# EAGLE board TDFC_V2.0_Black_10by10_1.6mm_ENIG_10pcs (EAGLE 6.5.0), part 1 of 2
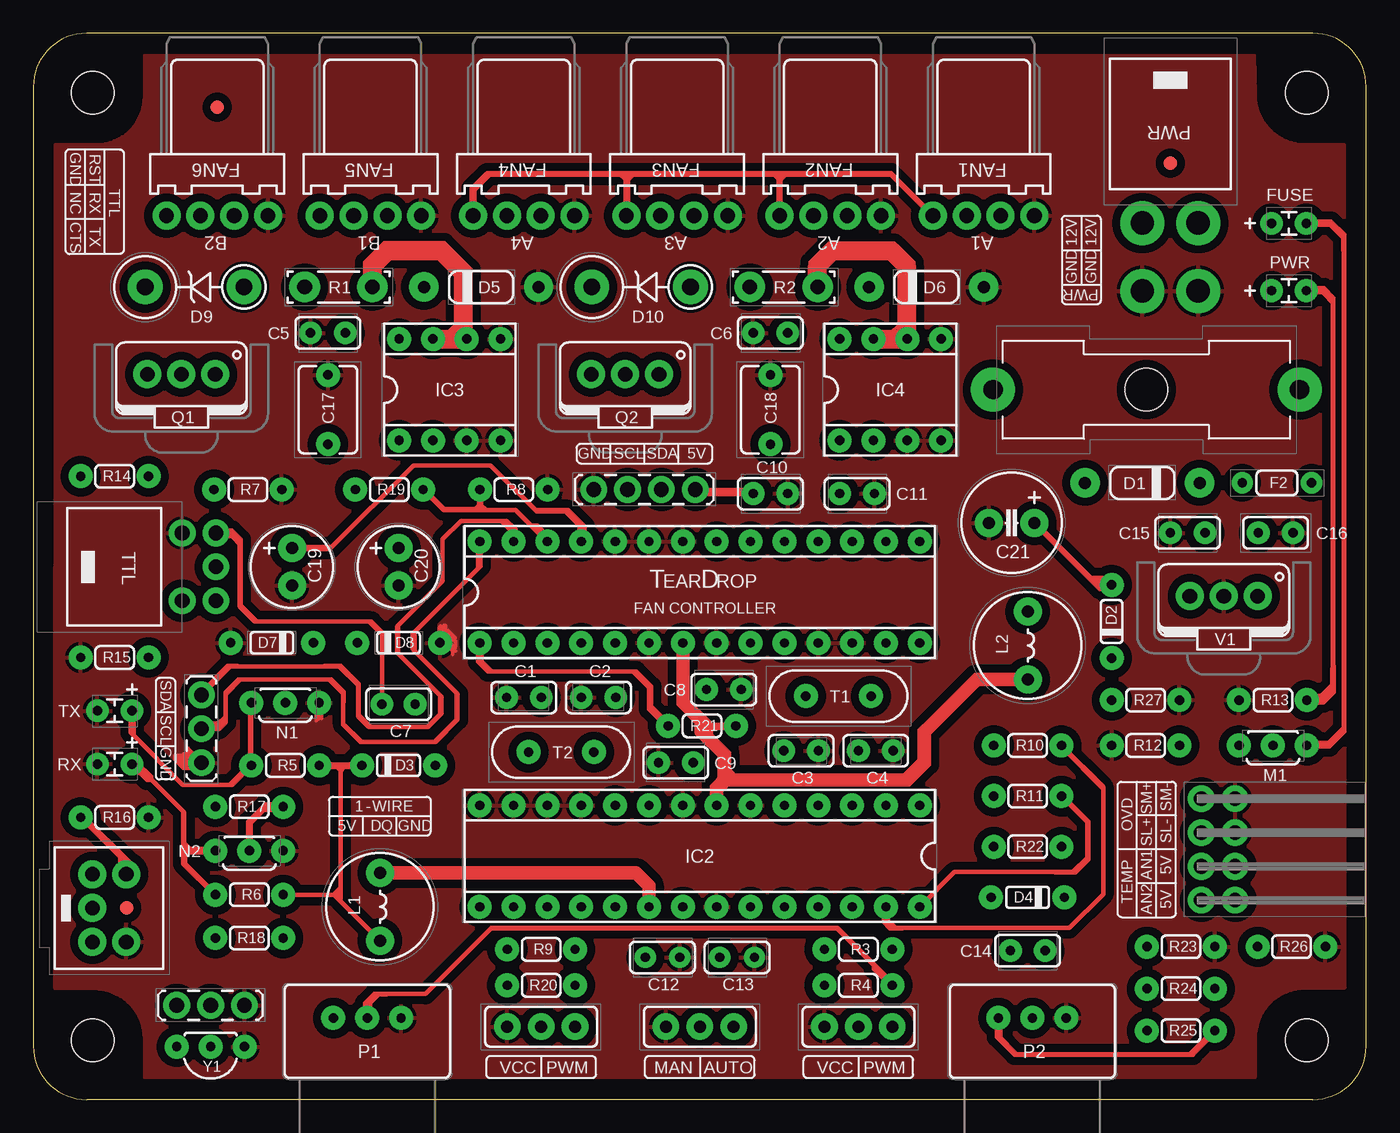
[diagram p0: board, top side]
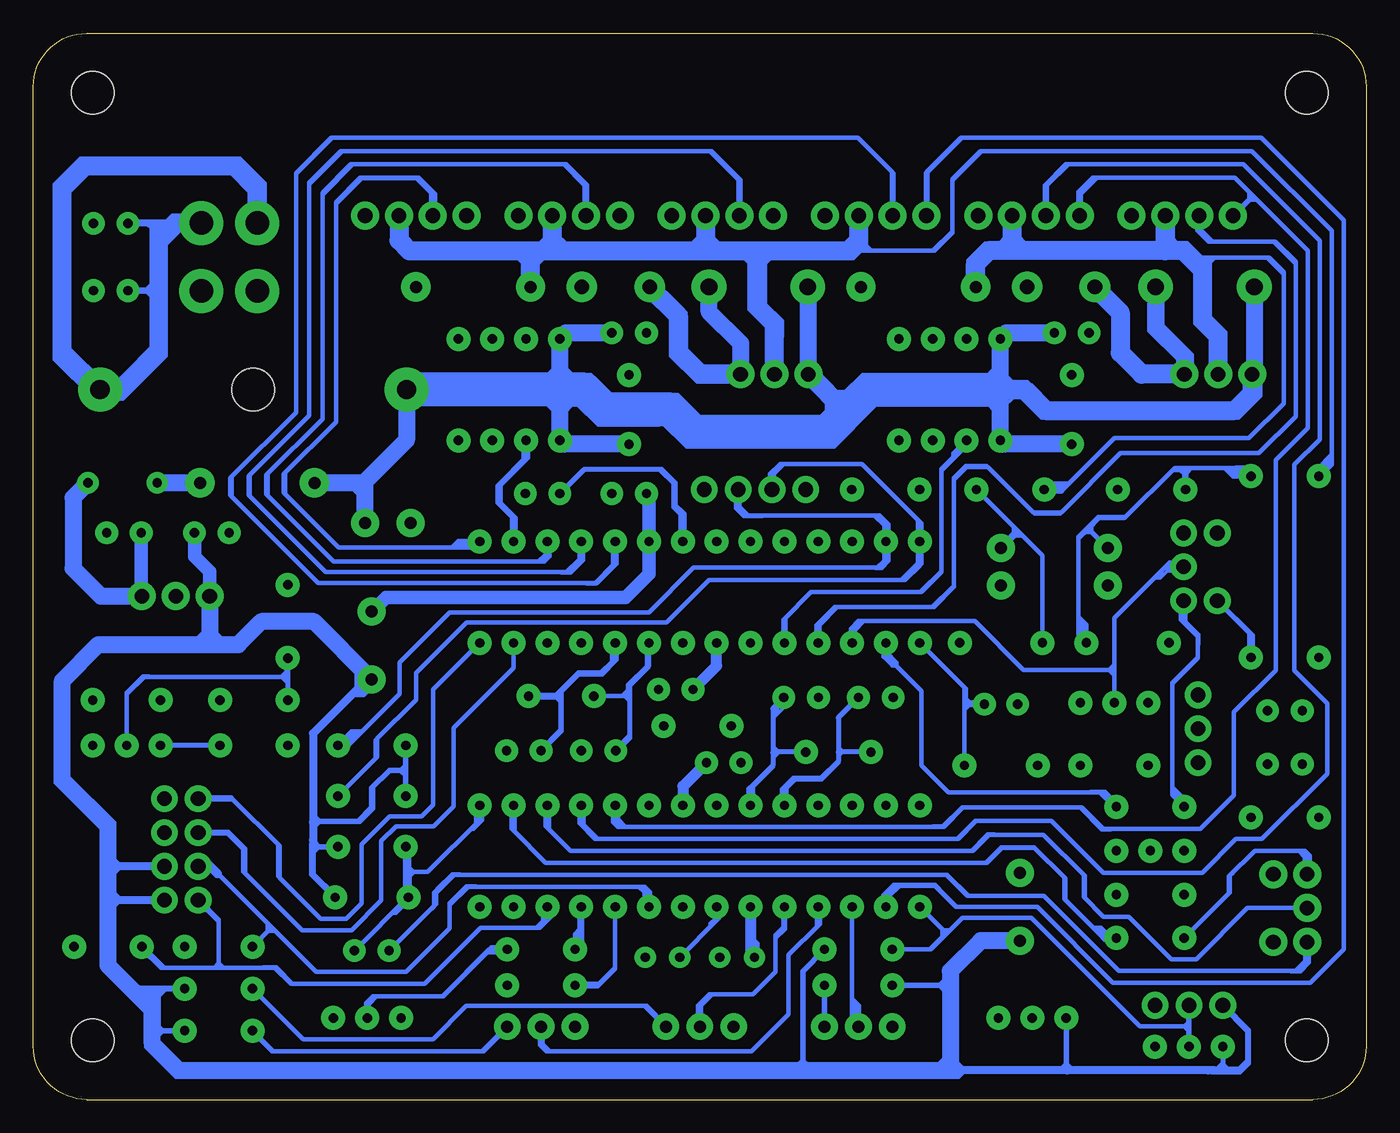
[diagram p1: board, bottom side, seen from below]

Size 100 x 80.01 mm. Coordinates in mm from the lower left corner, seen from the top.
Copper layers (1*16): Top 0.035mm / dielectric 1.5mm / Bottom 0.035mm
Design rules "ITEADstudio_DRC *": minimum track width 6mil, minimum drill 12mil, track to track 12mil, track to pad 12mil, pad to pad 12mil, via to via 12mil, smd to smd 0mil, copper to edge 12mil, drill to drill 12mil, minimum pad ring 10mil, minimum via ring 6mil, stop-mask expansion 2mil, vias tented up to drill 100mil, thermal gap 10mil
Net classes: 0 default: clearance 0.355 mm

## Footprints (pad centres in the part's own frame; a part is rotated, then mirrored left to right if it is on the bottom)
MLCC_CERAMIC_9 = drill 0.7 pad 1.7: 1 -1.3,0; 2 1.3,0
MLCC_CERAMIC_11 = drill 0.7 pad 1.7: 1 -1.3,0; 2 1.3,0
MLCC_CERAMIC_5 = drill 0.7 pad 1.7: 1 -1.3,0; 2 1.3,0
MLCC_CERAMIC_7 = drill 0.7 pad 1.7: 1 1.24,0; 2 -1.24,0
MLCC_CERAMIC = drill 0.7 pad 1.7: 1 -1.3,0; 2 1.3,0
MLCC_CERAMIC_17 = drill 0.7 pad 1.7: 1 -1.3,0; 2 1.3,0
MLCC_CERAMIC_6 = drill 0.7 pad 1.6: 1 -1.3,0; 2 1.3,0
MLCC_CERAMIC_14 = drill 0.7 pad 1.7: 1 -1.3,0; 2 1.3,0
MLCC_CERAMIC_16 = drill 0.7 pad 1.7: 1 -1.3,0; 2 1.3,0
MLCC_CERAMIC_15 = drill 0.7 pad 1.7: 1 -1.3,0; 2 1.3,0
WIMA_CAPACITOR_2 = drill 0.7 pad 1.8: 1 -2.6,0; 2 2.6,0
CAPACITOR_6.3_RIGHT = drill 0.9 pad 2.1: + 1.4,0; - -1.4,0
ELECTROLYTIC_CAPACITOR_RIGHT = drill 0.9 pad 2.1: + 1.7,0; - -1.7,0
UF4004 = drill 0.9 pad 2.2: A 4.3,0; C -4.3,0
1N4148 = drill 0.7 pad 1.8: A -2.75,0; C 2.75,0
1N4148_2 = drill 0.7 pad 1.8: A -2.75,0; C 2.75,0
UF4004_2 = drill 0.9 pad 2.2: A 4.3,0; C -4.3,0
DO34_2 = drill 0.7 pad 1.8: A -3.1,0; C 3.1,0
DO34Z7 = drill 0.7 pad 1.8: A 3.1,0; C -3.1,0
TVS_DIODE_5 = drill 1.25 pad 2.6: A 3.7,0; C -3.7,0
FUSE_GLASS = drill 1.45 pad 3.3: 1 11.5,0; 2 -11.5,0 | hole 3.2: 0,0
PTC = drill 0.7 pad 1.6: 1 -2.6,0; 2 2.6,0
4PIN_FAN_HEADER = drill 1.1 pad 2.1: 1 3.81,-2.34; 2 1.27,-2.34; 3 -1.27,-2.34; 4 -3.81,-2.34
FIDUCIAL-1X2 = smd 1 x 1: 1 0,0
LED_1.8_LEFT = drill 0.7 pad 1.7: A -1.3,0; K 1.3,0
IO_GENERAL_7 = drill 1.1 pad 2: SYSTEM_LED+ 1.27,1.27; SYSTEM_LED- 3.81,1.27; SYSTEM_MODE+ 1.27,3.81; SYSTEM_MODE- 3.81,3.81; TEMP_AN1_A 1.27,-1.27; TEMP_AN1_B 3.81,-1.27; TEMP_AN2_A 1.27,-3.81; TEMP_AN2_B 3.81,-3.81
TTL_USB_5 = drill 1.1 pad 2: CTS -2.54,-1.27; GND 2.54,-1.27; RST 2.54,-3.81; RX 0,-3.81; TX -2.54,-3.81
TT_USB_4 = drill 1.1 pad 2.1: CTS -2.54,1.27; GND 2.54,1.27; RST 2.54,-1.27; RX 0,-1.27; TX -2.54,-1.27
4_PIN_HEADER_VERTICAL_2 = drill 1.1 pad 2: GND -3.81,0; SCL -1.27,0; SDA 1.27,0; VCC 3.81,0
3_PIN_VERTICAL_4 = drill 1.1 pad 2: GND 0,-2.54; SCL 0,0; SDA 0,2.54
3_PIN_VERTICAL = drill 1.1 pad 2: DQ 0,0; GND 2.54,0; VCC -2.54,0
ATMEGA328P = drill 0.7 pad 1.8: 1 -16.51,-3.81; 2 -13.97,-3.81; 3 -11.43,-3.81; 4 -8.89,-3.81; 5 -6.35,-3.81; 6 -3.81,-3.81; 7 -1.27,-3.81; 8 1.27,-3.81; 9 3.81,-3.81; 10 6.35,-3.81; 11 8.89,-3.81; 12 11.43,-3.81; 13 13.97,-3.81; 14 16.51,-3.81; 15 16.51,3.81; 16 13.97,3.81; 17 11.43,3.81; 18 8.89,3.81; 19 6.35,3.81; 20 3.81,3.81; 21 1.27,3.81; 22 -1.27,3.81; 23 -3.81,3.81; 24 -6.35,3.81; 25 -8.89,3.81; 26 -11.43,3.81; 27 -13.97,3.81; 28 -16.51,3.81
ATMEGA328P_2 = drill 0.7 pad 1.8: 1 -16.51,-3.81; 2 -13.97,-3.81; 3 -11.43,-3.81; 4 -8.89,-3.81; 5 -6.35,-3.81; 6 -3.81,-3.81; 7 -1.27,-3.81; 8 1.27,-3.81; 9 3.81,-3.81; 10 6.35,-3.81; 11 8.89,-3.81; 12 11.43,-3.81; 13 13.97,-3.81; 14 16.51,-3.81; 15 16.51,3.81; 16 13.97,3.81; 17 11.43,3.81; 18 8.89,3.81; 19 6.35,3.81; 20 3.81,3.81; 21 1.27,3.81; 22 -1.27,3.81; 23 -3.81,3.81; 24 -6.35,3.81; 25 -8.89,3.81; 26 -11.43,3.81; 27 -13.97,3.81; 28 -16.51,3.81
TC4420 = drill 0.7 pad 1.8: 1 -3.81,-3.81; 2 -1.27,-3.81; 3 1.27,-3.81; 4 3.81,-3.81; 5 3.81,3.81; 6 1.27,3.81; 7 -1.27,3.81; 8 -3.81,3.81
INDUCTOR = drill 0.9 pad 2.1: 1 -2.54,0; 2 2.54,0
ZVP2106A = drill 0.7 pad 1.8: D -2.54,0; G 0,0; S 2.54,0
ZVN2106A = drill 0.7 pad 1.8: D -2.54,0; G 0,0; S 2.54,0
ZVN2106A_4 = drill 0.7 pad 1.8: D -2.54,0; G 0,0; S 2.54,0
POTENTIMETER_SQUARE = drill 0.7 pad 1.8: 1 -2.54,3.65; 2 0,3.65; 3 2.54,3.65
DP10080_V1 = hole 3.2: 5.25,76.185; 96.35,5.075; 5.25,5.075; 96.35,76.185
MOLEX_4PIN_2 = drill 1.75 pad 3.3: 1 2.1,-9; 2 -2.1,-9; 3 2.1,-14.1; 4 -2.1,-14.1
IRF5210 = drill 1.1 pad 2.1: D 0,4.3; G 2.54,4.3; S -2.54,4.3
V234/12 = drill 1.1 pad 2.3: 1 -2.54,0; 2 2.54,0
0204/5 = drill 0.7 pad 1.8: 1 -2.54,0; 2 2.54,0
LED_1.8_LEFT_2 = drill 0.7 pad 1.7: A 1.3,0; K -1.3,0
SLIDING_SWITCH_4 = drill 0.9 pad 2: 1 0,0; 2 -2.54,0; 3 2.54,0
SLIDING_SWITCH_5 = drill 0.9 pad 2: 1 0,0; 2 -2.54,0; 3 2.54,0
CRYSTAL_16MHZ = drill 0.7 pad 1.8: 1 -2.45,0; 2 2.45,0
LM7805 = drill 1.1 pad 2.1: GND 0,4.3; VI 2.54,4.3; VO -2.54,4.3
DS18B20 = drill 0.7 pad 1.8: D 0,0; G -2.54,0; V 2.54,0

## Placement (x,y rotation side)
C1  22pF/50V  [MLCC_CERAMIC_9]  36.8,30.18 180 top
C2  22pF/50V  [MLCC_CERAMIC_9]  42.4,30.18 180 top
C3  22pF/50V  [MLCC_CERAMIC_11]  57.6,26.18 0 top
C4  22pF/50V  [MLCC_CERAMIC_11]  63.2,26.18 0 top
C5  100nF/25V  [MLCC_CERAMIC_5]  22.1,57.52 0 top
C6  100nF/25V  [MLCC_CERAMIC_5]  55.3,57.52 0 top
C7  100nF/25V  [MLCC_CERAMIC_7]  27.4,29.68 0 top
C8  100nF / 25V  [MLCC_CERAMIC_5]  51.8,30.77 0 top
C9  100nF / 25V  [MLCC_CERAMIC_5]  48.2,25.27 180 top
C10  100nF/25V  [MLCC_CERAMIC]  55.3,45.48 0 top
C11  100nF/25V  [MLCC_CERAMIC_17]  61.8,45.48 0 top
C12  100nF/25V  [MLCC_CERAMIC_6]  47.2,10.68 0 top
C13  100nF / 25V  [MLCC_CERAMIC_6]  52.8,10.68 0 top
C14  100nF/25V  [MLCC_CERAMIC_14]  74.6,11.18 0 top
C15  100nF/25V  [MLCC_CERAMIC_16]  86.6,42.52 0 top
C16  470nF/25V  [MLCC_CERAMIC_15]  93.2,42.52 0 top
C17  (MKS2B042201F00JSSD)  [WIMA_CAPACITOR_2]  22.1,51.77 90 top
C18  (MKS2B042201F00JSSD)  [WIMA_CAPACITOR_2]  55.3,51.77 90 top
C19  100uF/50V  [CAPACITOR_6.3_RIGHT]  19.4,39.98 90 top
C20  100uF/50V  [CAPACITOR_6.3_RIGHT]  27.4,39.98 90 top
C21  470uF/35V  [ELECTROLYTIC_CAPACITOR_RIGHT]  73.4,43.27 0 top
D1  1N4007  [UF4004]  83.2,46.27 180 top
D2  1N4148  [1N4148]  80.9,35.88 270 top
D3  1N4148  [1N4148]  27.4,25.07 180 top
D4  1N4148_2  [1N4148_2]  74.6,15.18 0 top
D5  UF4004  [UF4004_2]  33.6,60.98 0 top
D6  UF4004  [UF4004_2]  67,60.98 0 top
D7  BZX79-B/C5V1  [DO34_2]  17.9,34.27 0 top
D8  BZX79-B/C5V1  [DO34Z7]  27.4,34.27 0 top
D9  ICTE12-E3/51  [TVS_DIODE_5]  12.1,60.98 0 top
D10  ICTE12-E3/51  [TVS_DIODE_5]  45.6,60.98 0 top
F1  6.3A  [FUSE_GLASS]  83.5,53.27 0 top
F2  0.5A/60V  [PTC]  93.3,46.27 0 top
FAN1  FAN_HEADER  [4PIN_FAN_HEADER]  71.3,68.67 0 top
FAN2  FAN_HEADER  [4PIN_FAN_HEADER]  59.8,68.67 0 top
FAN3  FAN_HEADER  [4PIN_FAN_HEADER]  48.3,68.67 0 top
FAN4  FAN_HEADER  [4PIN_FAN_HEADER]  36.8,68.67 0 top
FAN5  FAN_HEADER  [4PIN_FAN_HEADER]  25.3,68.67 0 top
FAN6  FAN_HEADER  [4PIN_FAN_HEADER]  13.8,68.67 0 top
FID1  FIDUCIAL1X2  [FIDUCIAL-1X2]  85.3,70.28 0 top
FID2  FIDUCIAL1X2  [FIDUCIAL-1X2]  13.8,74.47 0 top
FID3  FIDUCIAL1X2  [FIDUCIAL-1X2]  7,14.38 0 top
FUSE  RED  [LED_1.8_LEFT]  94.2,65.76 0 top
I/O_1  IO_GENERAL  [IO_GENERAL_7]  86.36,18.77 0 top
I/O_2  TTL_USB  [TTL_USB_5]  9.9,39.98 90 top
I/O_3  TT_USB_4  [TT_USB_4]  5.7,14.38 270 top
I/O_4  I2C  [4_PIN_HEADER_VERTICAL_2]  45.85,45.77 0 top
I/O_5  I2C  [3_PIN_VERTICAL_4]  12.61,27.82 0 top
I/O_6  ONE_WIRE  [3_PIN_VERTICAL]  13.3,7.08 0 top
IC1  ATMEGA328P  [ATMEGA328P]  50,38.08 0 top
IC2  ATMEGA328P  [ATMEGA328P_2]  50,18.27 180 top
IC3  MCP1406  [TC4420]  31.25,53.27 0 top
IC4  MCP1406  [TC4420]  64.3,53.27 0 top
L1  10uH/4.7A  [INDUCTOR]  26,14.47 270 top
L2  10uH/4.7A  [INDUCTOR]  74.6,34.08 270 top
M1  ZVP2106A  [ZVP2106A]  93,26.57 0 top
N1  ZVN2106A  [ZVN2106A]  18.9,29.77 0 top
N2  ZVN2106A_4  [ZVN2106A_4]  16.2,18.68 0 top
P1  10K  [POTENTIMETER_SQUARE]  25.05,2.48 0 top
P2  10K  [POTENTIMETER_SQUARE]  74.95,2.48 0 top
PCB1  80X100mm  [DP10080_V1]  -0.8,-0.62 0 top
POWER  4-PIN MOLEX  [MOLEX_4PIN_2]  85.3,74.78 0 top
PWR  GREEN  [LED_1.8_LEFT]  94.2,60.7 0 top
Q1  IRF5210PBF  [IRF5210]  11.1,50.12 0 top
Q2  IRF5210PBF  [IRF5210]  44.4,50.12 0 top
R1  100R/15W  [V234/12]  22.9,60.98 0 top
R2  100R/15W  [V234/12]  56.3,60.98 0 top
R3  470R/0.5W  [0204/5]  61.9,11.28 0 top
R4  470R/0.5W  [0204/5]  61.9,8.57 0 top
R5  1K/0.5W  [0204/5]  18.9,25.07 0 top
R6  1K/0.5W  [0204/5]  16.2,15.38 0 top
R7  4K7/0.5W  [0204/5]  16.1,45.77 0 top
R8  4K7/0.5W  [0204/5]  36.05,45.77 0 top
R9  4K7/0.5W  [0204/5]  38.1,11.28 0 top
R10  4K7/0.5W  [0204/5]  74.6,26.57 0 top
R11  4K7/0.5W  [0204/5]  74.6,22.77 0 top
R12  4K7/0.5W  [0204/5]  83.45,26.57 0 top
R13  4K7/0.5W  [0204/5]  93,29.98 0 top
R14  10K/0.5W  [0204/5]  6.1,46.77 0 top
R15  10K/0.5W  [0204/5]  6.1,33.17 0 top
R16  10K/0.5W  [0204/5]  6.1,21.18 0 top
R17  10K/0.5W  [0204/5]  16.2,21.98 0 top
R18  10K/0.5W  [0204/5]  16.2,12.12 0 top
R19  10K/0.5W  [0204/5]  26.7,45.77 0 top
R20  10K/0.5W  [0204/5]  38.1,8.57 0 top
R21  10K/0.5W  [0204/5]  50.17,28.04 0 top
R22  10K/0.5W  [0204/5]  74.6,18.98 0 top
R23  10K/0.5W  [0204/5]  86.1,11.47 0 top
R24  10K/0.5W  [0204/5]  86.1,8.32 0 top
R25  10K/0.5W  [0204/5]  86.1,5.17 0 top
R26  10K/0.5W  [0204/5]  94.4,11.47 0 top
R27  270K/0.5W  [0204/5]  83.45,29.98 0 top
RX  ORANGE  [LED_1.8_LEFT_2]  6.1,25.18 0 top
S1  LATCHING SWITCH  [SLIDING_SWITCH_4]  50,5.47 0 top
S2  LATCHING  [SLIDING_SWITCH_5]  61.9,5.47 0 top
S3  LATCHING  [SLIDING_SWITCH_5]  38.1,5.47 0 top
T1  16MHZ  [CRYSTAL_16MHZ]  60.4,30.27 0 top
T2  16MHZ  [CRYSTAL_16MHZ]  39.6,26.07 0 top
TX  YELLOW  [LED_1.8_LEFT_2]  6.1,29.18 0 top
U$1  TDFC_LOGO  [TDFC_LOGO]  50,35.77 0 top
U$2  MOLEX_4PIN_LEGEND_2  [MOLEX_4PIN_LEGEND_2]  78.64,62.91 0 top
U$3  FAN_HEADER_LEGEND  [FAN_HEADER_LEGEND]  71.3,64.28 0 top
U$4  TTL_USB_6  [TTL_USB_6]  4.6,67.38 0 top
U$5  3_PIN_VERTICAL_LEGEND  [3_PIN_VERTICAL_LEGEND]  26,21.27 0 top
V1  LM7805ACT  [LM7805]  89.31,33.48 0 top
Y1  DS18B20  [DS18B20]  13.3,3.97 180 top

## Library data of the parts
C1-C16 = MLCC_CERAMIC (CAPACITOR)
C17 C18 = WIMA_CAPACITOR
C19-C21 = ELECTROLYTIC_CAPACITOR
D1 D5 D6 = UF4004
D2-D4 = 1N4148
D7 D8 = ZENER DIODE (BZX79) - VER. 5.0
D9 D10 = TVS DIODE ((ICTE12-E3-51)
F1 = FUSE (GLASS)
F2 = PTC
FAN1-FAN6 = FAN_HEADER (4-PIN)
FID1-FID3 = SparkFun-Aesthetics
FUSE PWR RX TX = LED_1.8
I/O_1 = IO_4-PIN
I/O_2 I/O_3 U$4 = TTL_USB
I/O_4-I/O_6 U$5 = HEADER
IC1 IC2 = ATMEGA328P_VER_2.0
IC3 IC4 = TC4420
L1 L2 = INDUCTOR
M1 = ZVP2106A
N1 N2 = ZVN2106A
P1 P2 = POTENTIMETER_SQUARE
PCB1 = PCB_TEMPLATES - VER. 4.0; PCB_SIZE: DP10080_V1
POWER U$2 U$3 = POWER HEADER (MOLEX_4 PIN)
Q1 Q2 = MOSFET (IRF5210PBF)
R1 R2 = RESISTOR (100R, 15W, TO-126)
R3-R27 = RESISTOR (REGULAR, 0.25W)
S1-S3 = SLIDING_SWITCH
T1 T2 = CRYSTAL_16MHZ
U$1 = TDPC_LOGO
V1 = LM7805
Y1 = DS18B20

## Nets
1: C10.1 I/O_4.VCC IC1.20 L2.1
5V: C8.1 C9.1 C15.2 D3.C D4.C I/O_1.TEMP_AN1_B I/O_1.TEMP_AN2_B I/O_6.VCC IC1.7 IC2.7 L1.2 L2.2 P1.1 P2.1 R5.2 R6.2 R9.2 R10.1 R11.1 R20.1 R21.2 R22.2 R24.2 R25.2 V1.VO Y1.V
12V: C5.2 C6.2 C17.1 C18.1 C21.+ D1.A D2.A D9.C D10.C F1.2 IC3.1 IC3.8 IC4.1 IC4.8 Q1.S Q2.S
FAN_CONTROL_1: IC2.25 R3.1
FAN_CONTROL_2: IC2.24 R4.1
FAN_MODE_1: IC2.17 S3.1
FAN_MODE_2: IC2.18 S2.1
FAN_RPM_1: FAN1.3 IC1.15
FAN_RPM_2: FAN2.3 IC1.17
FAN_RPM_3: FAN3.3 IC1.18
FAN_RPM_4: FAN4.3 IC1.19
FAN_RPM_5: FAN5.3 IC2.4
FAN_RPM_6: FAN6.3 IC1.4
FAN_VCC_1: C19.+ D7.C IC1.25 R7.1 R14.2
FAN_VCC_2: C20.+ D8.C IC1.26 R8.1 R19.2
FAN_VCC_OUT_1: D6.C FAN1.2 FAN2.2 FAN3.2 FAN4.2 Q2.D R14.1
FAN_VCC_OUT_2: D5.C FAN5.2 FAN6.2 Q1.D R19.1
GND: C1.2 C2.2 C3.2 C4.2 C5.1 C6.1 C8.2 C9.2 C10.2 C11.2 C12.2 C13.2 C15.1 C16.2 C17.2 C18.2 C19.- C20.- C21.- D5.A D6.A D7.A D8.A FAN1.1 FAN2.1 FAN3.1 FAN4.1 FAN5.1 FAN6.1 I/O_1.SYSTEM_LED- I/O_1.SYSTEM_MODE- I/O_2.GND I/O_3.GND I/O_4.GND I/O_5.GND I/O_6.GND IC1.6 IC1.8 IC1.11 IC1.12 IC1.22 IC1.23 IC1.24 IC2.6 IC2.8 IC2.11 IC2.12 IC2.13 IC2.14 IC2.22 IC3.3 IC3.4 IC3.5 IC4.3 IC4.4 IC4.5 N1.S N2.S P1.3 P2.3 POWER.3 POWER.4 R7.2 R8.2 R12.1 R13.1 R15.1 R16.2 R23.2 R26.2 R27.2 RX.K S1.2 S2.2 S3.2 TX.K V1.GND Y1.G
I2C_SCL: I/O_4.SCL I/O_5.SCL IC1.28 IC2.28 R11.2
I2C_SDA: I/O_4.SDA I/O_5.SDA IC1.27 IC2.27 R10.2
N$1: C14.1 I/O_3.RST
N$4: D2.C M1.G R27.1
N$7: C13.1 IC2.21
N$8: F1.1 FUSE.A POWER.1 POWER.2 PWR.A
N$9: PWR.K R13.2
N$10: I/O_3.RX IC2.3
N$11: IC3.6 IC3.7 R1.2
N$12: D10.A Q2.G R2.1
N$13: IC4.6 IC4.7 R2.2
N$14: FUSE.K M1.S
N$16: I/O_3.TX R18.1
N$17: C11.1 IC1.21
N$19: D9.A Q1.G R1.1
N$20: I/O_3.CTS R16.1
N$22: D1.C F2.1
N$23: N1.D R5.1 TX.A
N$24: N2.D R6.1 RX.A
N$25: M1.D R12.2
N$26: R25.1 S2.3
N$28: C12.1 IC2.20 L1.1
N$29: R20.2 S3.3
N$32: IC2.2 R18.2
N$33: R24.1 S1.3
N$35: P2.2 R3.2
N$36: C4.1 IC1.10 T1.2
N$37: C14.2 D4.A IC2.1 R22.1
N$38: C3.1 IC1.9 T1.1
N$39: P1.2 R4.2
N$40: C2.1 IC2.9 T2.2
N$41: C1.1 IC2.10 T2.1
ONE_WIRE: I/O_6.DQ IC2.15 R9.1 Y1.D
POST_FUSE: C16.1 F2.2 V1.VI
PWM_DRIVE_1: FAN1.4 FAN2.4 FAN3.4 FAN4.4 IC2.16
PWM_DRIVE_2: FAN5.4 FAN6.4 IC2.5
RESET: C7.1 D3.A IC1.1 R21.1
SYSTEM_CONTROL: IC2.19 S1.1
SYSTEM_MODE: I/O_1.SYSTEM_MODE+ IC1.14
SYSTEM_MODE_LED: I/O_1.SYSTEM_LED+ IC1.13
TEMP_AN1: I/O_1.TEMP_AN1_A IC2.23 R23.1
TEMP_AN2: I/O_1.TEMP_AN2_A IC2.26 R26.1
USB_CTS: I/O_2.CTS R15.2
USB_RESET_2: C7.2 I/O_2.RST
USB_RX: IC1.2 N2.G R17.2
USB_RX_2: I/O_2.TX R17.1
USB_TX: I/O_2.RX IC1.3 N1.G
VCC_DRIVE_1: IC1.16 IC4.2
VCC_DRIVE_2: IC1.5 IC3.2

## Tracks (layer width: path | path; a pad name or v marks a point on that pad's centre or on a via)
1
  Top 0.254: 49.96,45.48 I/O_4.VCC 49.66,45.63 49.9,45.4 | 49.64,45.77 53.84,45.77 54.07,45.54 50.04,45.54 49.9,45.4 | 49.9,45.4 49.74,45.4 49.58,45.56 49.58,45.73 49.62,45.77 53.95,45.77 54.09,45.63 54.09,45.47 54.05,45.44
  Top 0.406: C10.1 49.96,45.48
  Bottom 1.016: L2.1 73.54,37.67 55.57,37.67 53.81,39.44 IC1.20 53.81,45.28 C10.1
5V
  Top 0.254: 23.32,14.6 23.26,14.6 22.49,15.37 22.49,15.39 | 22.49,15.39 22.68,15.39 23.05,15.77 23.05,14.9 23.14,14.81 | 23.14,14.81 25.47,12.48 | 23.07,14.87 23.12,14.81 23.14,14.81 | 21.91,15.37 22.47,15.37 22.49,15.4 | 22.49,15.4 23.01,15.91 23.01,24.68 22.75,24.94 21.48,24.94 21.39,25.02 21.39,25.1 21.48,25.19 24.65,25.19 24.71,25.13 24.71,25.02 24.63,24.95 23.35,24.95 23.08,24.68 23.08,24.47 23.05,24.44 23.05,24.6 23.4,24.95 | 22.49,15.39 22.49,15.4 | 72.41,6.2 72.54,6.2 | 72.54,6.2 72.59,6.15 72.59,4.56 72.58,4.55 72.55,4.55 72.3,4.8 72.3,6.14 72.36,6.2 72.44,6.2 72.45,6.21 72.36,6.21 72.26,6.11 72.26,4.81 72.53,4.54 | 72.54,6.2 72.47,6.12 P2.1 72.37,6.08 72.26,6.08 72.26,4.74 73.63,3.37 | 88.7,5.22 88.67,5.19 88.65,5.19 R25.2 | 88.7,5.22 88.7,5.07 86.98,3.35 | 73.63,3.37 86.67,3.37 | 88.68,5.25 88.56,5.25 88.59,5.22 88.7,5.22 | 74.72,3.45 74.63,3.36 73.64,3.36 73.63,3.37 | 87.03,3.36 86.99,3.36 86.94,3.41 86.68,3.41 88.52,5.24 88.67,5.24 88.65,5.22 R25.2 | 87.03,3.36 88.71,5.04 | 87.03,3.36 87.02,3.35 73.61,3.35 72.27,4.69 72.27,6.16 72.32,6.21 | 88.65,5.2 88.61,5.24 88.58,5.24 | 88.56,5.24 88.58,5.24 | 88.58,5.24 R25.2 | 48.74,30.6 48.44,30.3 48.35,30.3 48.35,29.65 49.7,28.3 49.7,27.54 50.11,27.13 50.58,27.13 50.75,27.3 50.75,28.32 | 50.75,28.32 49.02,30.06 | 50.75,28.32 50.92,28.15 52.72,28.15 52.79,28.08 52.79,27.96 52.68,27.84 52.54,27.84 | 52.54,27.84 50.99,27.84 50.89,27.74 50.89,27.67 | 50.89,27.23 50.89,27.67 | 50.89,27.67 51.14,27.93 51.03,27.93 50.86,27.76 50.86,27.44 52.23,26.07 52.23,24.72 52.26,24.72 52.81,24.18 52.67,24.18 51.51,23.03 51.09,23.03 50.9,23.22 50.9,23.3
  Top 0.254: 51.41,26.18 51.43,26.16 51.43,24.06 50.9,23.52 50.9,23.3 | R21.2 52.71,28.02 52.54,27.84 | 63.14,24.02 63.54,23.62 65.72,23.62 67.22,25.12 | 67.22,25.12 67.22,28.49 | 67.22,28.49 67.97,29.25 | 67.22,28.49 66.46,27.73 66.46,25.32 | 66.84,25.34 67.01,25.34 67.22,25.12 | 69.1,29.8 69.1,30.36 70.64,31.91 | 70.64,31.91 73.86,31.91 | 70.8,31.53 70.8,31.75 70.64,31.91 | 51.33,22.03 50.89,22.03 50.88,22.02 50.88,23.28 | 50.88,23.28 50.88,23.56 51.68,24.36 | 50.9,23.3 50.88,23.28
  Top 0.356: L1.2 23.07,14.87 23.07,15.16 | 23.07,15.16 23.07,25.07 | R6.2 22.85,15.38 23.07,15.16 | R5.2 23.07,25.07 | 23.07,25.07 D3.C
  Top 0.381: P2.1 72.41,4.75 73.74,3.42 86.89,3.42 R25.2
  Top 0.406: R21.2 50.5,28.04 50.11,28.43
  Top 1.016: L2.2 70.8,31.53 66.84,27.57 66.84,25.34 65.49,23.99 51.87,23.99 51.84,24.01 | 51.84,24.01 51.84,25.91 50.11,27.65 50.11,28.43 48.73,29.81 IC1.7 | 51.84,24.01 51.84,23.87 51.27,23.3 IC2.7
  Bottom 0.254: 10.8,2.2 10.76,2.24 10.76,2.45 10.91,2.3 11.11,2.3 | 11.79,2.22 11.69,2.12 | 11.69,2.12 11.59,2.02 9.82,2.02 | 10.37,2.23 10.72,2.57 10.72,2.67 | 10.72,2.67 10.75,2.7 10.79,2.7 11.18,2.3 11.11,2.3 | 11.11,2.3 10.76,2.65 10.75,2.65 10.35,2.25 | 11.86,2.2 11.69,2.2 11.69,2.12 | 21.86,2.26 22.05,2.26 | 22.05,2.26 22.45,2.65 22.59,2.65 22.94,2.3 22.97,2.3 22.96,2.31 22.96,2.32 22.54,2.73 22.47,2.73 21.96,2.23 21.82,2.23 | 22.51,2.29 22.05,2.29 22.05,2.26 | 10.5,2.16 10.36,2.02 9.63,2.02 8.92,2.73 | 8.92,2.73 8.8,2.85 | 8.87,2.89 8.92,2.83 8.92,2.73 | 32.76,2.21 32.24,1.69 30.83,1.69 | 30.83,1.69 30.49,2.03 30.49,2.24 30.39,2.34 30.39,2.42 | 30.39,2.42 30.76,2.79 | 30.39,2.42 30.11,2.14 30.28,2.14 30.71,1.7 31.86,1.7 32.21,2.05 32.21,2.58 31.63,3.15 31.44,3.15 31.34,3.06 30.81,3.06 30.77,3.01 30.77,2.79 | 30.77,2.79 30.67,2.79 30.23,2.35 30.23,2.03 30.57,1.69 30.83,1.69 | 31.2,2.32 31.06,2.46 31.06,2.56 30.83,2.79 30.77,2.79 | 41.82,2.56 42.27,3.01 42.3,3.01 42.74,2.57 42.74,2.55 42.5,2.55 42.27,2.78 | 90.16,5.22 90.27,5.22 90.59,5.55 | 90.59,5.55 90.39,5.35 | 90.39,5.35 90.25,5.21 90.25,5.14 90.63,4.76 | 91.02,5.58 90.98,5.54 90.87,5.54 90.86,5.55 90.59,5.55 | 91.7,7.82 91.02,7.82 91.01,7.81 | 91.01,7.81 90.91,7.71 90.91,7.35 90.54,6.98 | 90.54,6.98 90.54,5.47 90.39,5.31 90.39,5.35 | 88.37,2.04 88.71,1.69 89.32,1.69 91.57,3.94 91.57,5.01 91.11,5.01 91.08,5.05 91.08,5.14 91.07,5.15 | 31.16,7.91 31.42,7.91 | 31.42,7.91 31.98,8.46 31.98,8.7 31.72,8.95 | 31.2,8.26 31.42,8.04 31.42,7.91 | 90.86,7.61 90.86,6.97 90.87,6.99 90.87,7.79 90.92,7.85 91.01,7.85 | 91.01,7.85 91.57,7.85 | 91.01,7.81 91.01,7.79
  Bottom 0.254: 91.01,7.81 91.01,7.85 | 94.27,14.04 94.27,14.13 93.56,14.84 93.56,15.17 94.04,15.66 94.04,16.83 93.6,17.27 93.6,17.74 93.92,18.05 93.92,18 94.19,17.73 94.19,17.62 94.3,17.5 | 93.99,19.8 93.89,19.91 93.89,20.79 97.33,24.22 | 97.33,24.22 97.33,24.52 98.06,25.25 98.24,25.25 98.35,25.14 98.35,23.76 94.72,20.13 94.72,20.05 | 97.83,23.99 97.72,24.1 97.65,24.1 97.53,24.22 97.33,24.22 | 77.37,15.11 77.28,15.2 77.28,15.32 78.99,17.03 78.99,18.47 78.5,18.96 78.5,19 78.87,19.37 79.01,19.37 79.2,19.18 79.2,16.87 77.4,15.08 77.4,15.09 | 77.4,15.09 77.23,15.26 | D4.C 77.4,15.13 77.4,15.09 | 78.51,20.88 78.51,20.8 78.78,20.53 | 78.78,20.53 78.95,20.36 78.95,21.53 78.94,21.54 78.94,21.37 78.49,20.92 | 78.98,20.88 78.78,20.68 78.78,20.53 | 76.72,20.89 76.63,20.81 75.47,20.81 74.48,21.8 74.48,23.43 74.3,23.6 74.48,23.6 74.7,23.38 | 74.7,23.38 74.7,21.93 75.7,20.93 | 74.6,23.38 74.58,23.36 74.58,23.34 74.62,23.38 74.7,23.38 | 72.03,24.27 72.12,24.27 72.44,24.6 72.44,24.78 | 72.44,24.78 72.13,25.09 | 72.06,24.69 72.14,24.78 72.44,24.78 | 75.51,31.17 75.51,31.64 75.67,31.79 75.68,31.78 75.68,31.27 75.55,31.39 75.55,31.85 75.52,31.82 75.52,30.86 75.49,30.9 75.49,32.46 75.77,32.18 75.77,30.81 75.29,30.81 75.24,30.76 75.31,30.76 75.56,30.5 75.4,30.5 75.39,30.51 75.27,30.51 74.85,30.93 75.41,30.93 76.03,30.31 75.17,30.31 74.14,31.35 74.14,31.36 74.34,31.55 74.49,31.55 74.51,31.53 L2.2 | 87.71,34.63 87.25,35.09 86.33,35.09 85.48,34.23 85.56,34.14 | 91.06,6.43 90.55,6.95 90.55,7.93 90.75,7.73 90.75,7.3 | 90.75,7.3 90.66,7.39 90.66,7.95 | 90.54,6.98 90.54,7.1 90.75,7.3
  Bottom 0.254: 90,8.31 90.54,7.77 90.54,6.22 91.07,5.69 91.07,5.68 91.07,5.63 | 90,8.31 89.87,8.31 | 90,8.31 90.32,8.31 90.61,8.02 91.62,8.02 91.69,7.95 91.37,7.95 90.99,7.57 91.36,7.57 92.22,8.43 | 92.34,8.54 92.22,8.43 | 92.22,8.43 89.23,8.43 | 88.56,8.33 88.63,8.41 89.76,8.41 89.75,8.43 88.65,8.43 88.64,8.42 88.59,8.42 | 88.59,8.42 88.56,8.39 88.56,8.29 | R24.2 88.64,8.36 88.59,8.42 | 8.82,2.96 8.82,3.09 | 8.82,3.26 8.82,3.09 | 8.82,3.09 9.57,2.34 10.92,2.34 11,2.26 10.27,2.26 10.25,2.24 10.26,2.24 10.71,2.69 | 10.71,2.69 10.86,2.69 11.21,2.34 | 10.72,2.67 10.72,2.68 10.71,2.69 | 11.79,2.18 11.63,2.02 9.43,2.02 8.76,2.69 8.76,5.25 10.66,7.15 10.77,7.15 10.76,7.14 I/O_6.VCC
  Bottom 0.356: 66.5,2.55 66.85,2.2 | 10.8,2.2 11.31,2.2 | 22.51,2.29 22.42,2.2 | 91.02,5.58 91.07,5.63
  Bottom 0.381: 41.17,2.36 41.01,2.2 | Y1.V 10.76,2.45 | 67.33,2.4 67.53,2.2 | 9.73,2.2 10.74,2.2 11.86,2.2
  Bottom 0.406: 73.58,2.42 73.8,2.2 | 68.99,2.26 68.93,2.2 | 31.23,8.57 31.2,8.54 | 41.69,2.2 42.27,2.78 42.27,9.64 R9.2 | R20.1 31.52,8.57 31.2,8.26 | R10.1 72.06,24.69 | 72.06,24.69 73.28,24.69 74.6,23.38 74.6,21.91 75.64,20.88 78.98,20.88 79.02,20.83 | R22.2 78.96,18.98 78.98,19 | D4.C 79.02,16.85 79.02,19.47 | R11.1 72.06,24.69 | P1.1 22.51,2.29 | R25.2 91.04,5.17 | I/O_6.VCC 8.87,5.18 8.87,2.89 9.55,2.2 10.74,2.2 | R24.2 92.05,8.32 92.35,8.03
  Bottom 0.508: 91.04,5.17 91.07,5.15
  Bottom 0.607: I/O_1.TEMP_AN1_B 94.3,17.5 94.4,17.41 | I/O_1.TEMP_AN2_B 94.31,14.96 94.4,15.06
  Bottom 0.61: 10.87,2.2 11.31,2.2 11.86,2.2 22.42,2.2 33.97,2.2 | L2.2 74.97,31.53 79.02,27.48 79.02,20.83 79.02,19.47 79.02,19.04 78.98,19
  Bottom 0.813: C8.1 48.73,32.55 IC1.7 | C9.1 51.27,23.5 IC2.7
  Bottom 1.016: C15.2 87.9,40.75 86.77,39.62 V1.VO
  Bottom 1.27: L1.2 28.92,11.94 31.2,9.66 31.2,8.54 31.2,8.26 31.2,2.32 31.32,2.2 33.97,2.2 41.01,2.2 41.69,2.2 66.85,2.2 67.53,2.2 68.93,2.2 73.8,2.2 89.08,2.2 91.07,4.18 91.07,5.15 91.07,5.63 91.07,6.75 92.35,8.03 94.4,10.08 94.4,15.06 94.4,17.41 94.4,20.56 97.83,23.99 97.83,31.43 95.12,34.14 86.92,34.14 | L2.2 78.94,35.88 82.9,35.88 84.63,34.14 85.56,34.14 86.92,34.14 | V1.VO 86.77,34.29 86.92,34.14
12V
  Top 0.254: 79.57,38.68 79.97,38.28 80.87,38.28 80.95,38.36 80.95,39.02 80.83,39.15 80.8,39.15 80.56,38.9 79.74,38.9 79.83,38.81 80.65,38.81 80.49,38.96 79.66,38.96 79.68,38.98 80.69,38.98 80.98,38.69 80.98,38.52 80.9,38.45 79.78,38.45 75.06,43.17 75.06,43.27 75.15,43.36 75.21,43.36 79.39,39.18 80.8,39.18 80.93,39.04 80.93,38.65 80.92,38.65 D2.A
  Top 0.356: D2.A 79.75,38.62 C21.+
  Bottom 0.254: 75.35,45.2 75.74,45.59 | 75.74,45.59 76.06,45.92 | 76.06,45.92 76.06,45.96 | 76.06,45.92 76.06,45.84 75.47,45.25 | 75.2,46.27 75.2,46.13 75.56,45.77 75.62,45.77 75.74,45.66 75.74,45.59 | 71.76,51.46 71.76,51.59 71.17,52.18 | 71.17,52.18 71.08,52.27 | F1.2 72,53.09 71.77,52.86 71.77,52.78 71.17,52.18 | 26.4,49.63 26.4,49.35 26.93,49.88 26.99,49.88 27.24,49.63 27.24,49.51 27.28,49.47 IC3.1 | 26.33,52.85 27.3,51.88 27.87,51.88 27.87,51.72 27.6,51.45 27.67,51.45 28.62,52.41 28.62,54.15 27.93,54.85 27.51,54.85 26.56,53.9 25.42,53.9 23.65,52.13 | 23.65,52.13 23.17,52.13 22.38,51.34 22.59,51.14 24.38,51.14 26.05,52.81 | 24.07,51.72 24.01,51.72 23.95,51.79 23.95,51.84 23.65,52.13 | 36.38,54.42 37.8,54.42 39.21,53.01 39.21,52.92 40.51,51.62 40.51,52.87 40.2,53.18 40.14,53.12 38.17,53.12 37.82,52.77 | 37.31,53.27 37.31,53.08 37.53,52.87 37.53,52.48 36.96,51.91 | 36.04,52.19 36.09,52.14 36.74,52.14 36.96,51.91 | 36.96,51.91 39.9,48.98 40.94,48.98 | 47.61,50.42 48.44,51.25 49.97,51.25 51.63,52.92 54.16,52.92 50.22,48.98 | 50.22,48.98 48.98,48.98 | 50.22,48.98 51.01,48.98 52.85,50.82 53.06,50.61 57.65,50.61 59.16,52.13 59.57,52.13 60.16,51.53 60.81,51.53 61.37,52.09 61.37,53.56 | 61.37,53.56 61.37,54.45 60.93,54.89 60.04,54.89 59.51,54.37 59.46,54.42 58.15,54.42 56.63,52.9 | 61.69,53.32 61.59,53.32 61.34,53.56 61.37,53.56 | 11.76,51.65 11.26,51.14 9.56,51.14 7.9,52.8 7.9,54.64 8.29,54.25 8.56,54.25 | 8.56,54.25 9.16,54.25 | Q1.S 8.56,54.25
  Bottom 0.356: C17.1 22.2,49.27 27.27,49.27 27.51,49.51 27.51,53.27 | C18.1 55.4,49.27 60.16,49.27 60.62,49.73 60.62,49.82 60.55,49.89 60.55,53.27
  Bottom 0.381: 28.42,53.18 28.44,53.2 | 60.34,53.3 61.67,53.3 61.69,53.32
  Bottom 1.27: 28.44,53.2 28.44,53.27 28.92,53.27 29,53.35 | 28.51,53.35 28.59,53.27 | 60.34,53.3 60.24,53.3 60.21,53.27 | C17.1 27.15,49.17 IC3.1 IC3.8 27,57.52 C5.2 | C18.1 60.2,49.17 IC4.1 IC4.8 60.05,57.52 C6.2 | 41.9,50.54 42.32,50.12 | D10.C 41.9,54.47 Q2.S | D9.C 8.4,54.59 Q1.S | F1.2 72,49.47 75.1,46.37 | 75.1,46.37 75.2,46.27 D1.A | C21.+ 75.1,46.37
  Bottom 1.422: 28.59,53.27 28.44,53.27 | 27.86,53.27 27.51,53.27 25.62,53.27 24.07,51.72 9.85,51.72 8.56,53.01 8.56,54.25 Q1.S | 39.17,51.73 39.17,51.41 | Q2.S 39.03,51.6 39.03,51.55
  Bottom 2.54: 27.86,53.27 28.44,53.27 37.31,53.27 37.82,52.77 39.03,51.55 39.17,51.41 40.46,50.12 42.32,50.12 50.47,50.12 52.12,51.77 57.11,51.77 58.61,53.27 60.21,53.27 60.55,53.27 F1.2
FAN_CONTROL_1
  Bottom 0.254: 59.34,11.24 59.37,11.24 59.41,11.28 59.41,12.44 59.04,12.8 59.04,14.38 58.91,14.51 58.84,14.51 58.79,14.46 58.79,11.77 59.33,11.23 59.33,11.3 | 59.33,11.3 59.33,12.29 59.05,12.56 59.05,11.74 59.14,11.65 59.14,12.33 | R3.1 59.34,11.29 59.34,11.3 59.33,11.3
  Bottom 0.356: IC2.25 58.89,11.74 R3.1
FAN_CONTROL_2
  Bottom 0.254: 59.42,8.58 59.42,8.61 59.31,8.72 | 59.31,8.72 57.6,8.72 56.43,9.9 56.43,9.67 57.63,8.47 59.33,8.47 59.44,8.58 59.44,8.62 59.34,8.72 | R4.1 59.31,8.63 59.31,8.72
  Bottom 0.356: R4.1 57.6,8.57 56.35,9.82 IC2.24
FAN_MODE_1
  Bottom 0.254: 38.11,5.43 38.08,5.43 | 38.08,5.43 38.03,5.48 38.03,7.09 38.53,7.59 38.53,7.41 38.23,7.11 38.23,5.86 38.28,5.8 38.28,7.06 38.33,7.11 | S3.1 38.08,5.46 38.08,5.43
  Bottom 0.356: S3.1 38.57,5.95 IC2.17
FAN_MODE_2
  Bottom 0.254: 61.91,5.54 61.92,5.54 | 61.92,5.54 62.03,5.43 62.03,4.07 61.54,3.59 61.15,3.59 | 60.74,3.59 61.15,3.59 | 61.15,3.59 61.76,4.19 61.76,5.49 61.83,5.56 61.95,5.56 62.03,5.48 | S2.1 61.92,5.49 61.92,5.54 | 41.14,14.52 41.24,14.43 41.24,12.96 41.15,12.96 40.96,13.15 40.96,14.43 | 40.96,14.43 41.05,14.52 41.12,14.52 | IC2.18 41.08,14.43 40.96,14.43
  Bottom 0.356: IC2.18 41.11,13.07 43.33,10.85 43.33,6.41 46.1,3.64 61.36,3.64 61.9,4.18 S2.1
FAN_RPM_1
  Bottom 0.254: 80.94,45.25 81.06,45.37 81.06,47.03 81.15,46.94 81.2,46.94 | 66.47,41.95 68.13,41.95 68.62,41.46 67.29,41.46 66.95,41.8 | 66.95,41.8 68.08,41.8 68.23,41.64 67.26,41.64 67.22,41.68 | IC1.15 66.77,41.88 66.85,41.8 66.94,41.8 66.95,41.8 | 77.25,67.19 75.32,69.12 71.3,69.12 70.2,68.02 70.2,66.42 70.06,66.29 70.05,66.29 70.05,66.31 FAN1.3 | 70,66.23 70,66.25 69.84,66.41 69.84,68 71.04,69.2 75.5,69.2 75.52,69.17 | 75.47,69.17 75.52,69.17 | 75.52,69.17 75.78,68.92
  Bottom 0.356: IC1.15 66.97,41.43 77.09,41.43 81.2,45.54 81.2,46.94 77.3,50.84 77.3,67.35 75.47,69.17 71.13,69.17 70.03,68.08 FAN1.3
FAN_RPM_2
  Bottom 0.254: 82.18,45.13 82.39,45.34 | 82.39,45.34 82.39,46.97 | 82.53,45.44 82.48,45.44 82.39,45.34 | 62.3,40.4 62.12,40.4 61.59,40.94 61.59,41.89 61.53,41.95 61.31,41.95 61.25,41.89 | 61.25,41.89 61.25,40.75 61.66,40.33 62.44,40.33 62.43,40.32 61.66,40.32 61.27,40.72 61.27,41.9 | IC1.17 61.25,41.88 61.25,41.89 | 78.3,67.6 78.3,67.84 75.97,70.17 | 76.18,70.17 75.97,70.17 | 75.97,70.17 75.96,70.18 | 58.55,66.31 58.67,66.43 58.67,68.58 60.31,70.22 | 60.31,70.22 61.1,70.22 | 60.31,70.22 59.99,70.22 58.41,68.64 58.41,66.36 58.47,66.31 58.55,66.31 | 58.55,66.31 58.57,66.31 58.64,66.39 58.65,66.39 | 58.55,66.31 FAN2.3
  Bottom 0.356: IC1.17 61.43,40.8 61.86,40.38 77.46,40.38 82.53,45.44 82.53,46.85 78.3,51.08 78.3,68.05 76.18,70.17 60.13,70.17 58.53,68.58 FAN2.3
FAN_RPM_3
  Bottom 0.254: 83.63,45.14 83.72,45.24 83.72,46.89 83.83,46.78 83.85,46.78 | 58.91,41.94 58.97,41.88 | 58.85,41.96 58.72,41.82 58.72,40.46 59.65,39.52 60.41,39.52 60.46,39.57 60.08,39.57 59.07,40.58 59.07,41.78 58.97,41.88 | IC1.18 58.97,41.88 | 76.76,71.17 79.27,68.67 79.27,68.44 79.3,68.47 79.3,68.81 | 47.05,66.26 47.14,66.35 47.14,68.98 49.36,71.21 | 49.36,71.21 49.45,71.21 49.41,71.17 49.13,71.17 | 49.36,71.21 49.1,71.21 46.92,69.03 46.92,66.37 47.03,66.26
  Bottom 0.356: IC1.18 58.89,40.53 59.84,39.58 78.07,39.58 83.85,45.36 83.85,46.78 79.3,51.34 79.3,68.81 76.93,71.17 49.13,71.17 47.03,69.08 FAN3.3
FAN_RPM_4
  Bottom 0.254: 84.99,45.1 85.09,45.2 85.09,46.77 85.23,46.63 85.23,46.62 | 58.24,38.82 57.86,38.82 56.54,40.15 56.54,41.81 56.4,41.95 56.3,41.95 56.21,41.85 56.21,40.19 57.68,38.72 58.48,38.72 58.49,38.71 57.78,38.71 57.77,38.72 | 57.77,38.72 57.61,38.87 | 57.75,38.77 57.77,38.76 57.77,38.72 | 80.32,69.16 80.32,69.35 77.5,72.17 | 77.66,72.17 77.5,72.17 | 77.5,72.17 77.49,72.18 | 35.54,66.28 35.48,66.33 35.44,66.33 35.43,66.34 35.43,69.52 35.63,69.72 | 35.84,69.93 35.63,69.72 | 35.63,69.72 35.63,66.33 35.55,66.26 35.52,66.26 35.44,66.33 | FAN4.3 35.44,66.33 | 35.44,66.33 35.42,66.35
  Bottom 0.356: IC1.19 56.35,40.17 57.75,38.77 78.65,38.77 85.23,45.36 85.23,46.62 80.3,51.56 80.3,69.53 77.66,72.17 38.13,72.17 35.53,69.58 FAN4.3
FAN_RPM_5
  Bottom 0.254: 31.21,19.55 30.77,19.55 29.36,20.95 29.3,20.95 | 29.3,20.95 28.39,20.95 | 29.27,20.91 29.29,20.88 29.3,20.88 29.3,20.95 | 58.89,22.16 58.96,22.16 59.08,22.05 59.08,20.72 57.89,19.54 57.57,19.54 | 57.25,19.54 57.57,19.54 | 57.57,19.54 58.69,20.65 58.69,22.04 | 58.69,22.04 58.81,22.16 58.89,22.16 58.91,22.14 | IC2.4 58.84,22.04 58.69,22.04 | 22.04,70.22 22.11,70.16 22.32,70.16 23.91,68.57 23.91,66.37 24,66.28 24.03,66.28 FAN5.3 | 22.04,70.22 20.94,70.22 | 22.04,70.22 22.55,70.22 24.15,68.62 24.15,66.37 24.09,66.3 23.96,66.3 23.9,66.36
  Bottom 0.356: FAN5.3 24.03,68.58 22.43,70.17 9.22,70.17 3.5,64.46 3.5,49.55 5.41,47.64 5.41,32.2 2.92,29.72 2.92,24.45 7.82,19.55 9.77,19.55 12.31,17.01 19.72,17.01 23.61,20.91 29.27,20.91 30.6,19.57 57.76,19.57 58.89,20.71 IC2.4
FAN_RPM_6
  Bottom 0.254: 41.12,34.21 41.06,34.21 40.98,34.28 40.98,35.59 39.63,36.95 39.65,36.95 39.73,37.02 39.89,37.02 41.3,35.62 41.3,34.28 41.22,34.2 41.12,34.2 | 41.12,34.2 41.04,34.2 41,34.24 | IC1.4 41.12,34.25 41.12,34.2 | 32.92,36.97 32.88,36.93 32.41,36.93 30.88,38.46 | 30.88,38.46 30.88,39.17 | 30.88,38.46 30.99,38.46 31.03,38.42 31.06,38.45 | 22.51,44.37 22.96,43.92 24.91,43.92 | 24.91,43.92 25.21,44.22 | 24.91,43.92 24.91,43.98 24.93,44 24.93,44.06 | 28,47.09 28,47.15 28.44,47.59 28.51,47.59 | 28.51,47.59 29.68,47.59 | 29.68,47.59 29.98,47.59 30.2,47.38 | 28.38,47.46 28.5,47.46 28.51,47.47 28.51,47.59 | 30.93,46.25 30.93,46.46 29.9,47.49 29.9,47.53 29.96,47.6 | 29.96,47.6 30.06,47.6 30.98,46.67 30.98,45.68 | 29.96,47.6 29.68,47.6 29.68,47.59 | 12.52,66.4 12.48,66.4 12.4,66.32 | 12.4,66.32 12.32,66.24 12.32,65.24 11.57,64.49 11.57,64.41 11.65,64.34 11.84,64.34 12.32,64.82 | 12.32,64.82 12.65,65.15 | 12.65,65.15 12.65,66.38 12.61,66.42 12.4,66.42 12.32,66.34 12.32,64.82 | 12.65,65.15 12.72,65.22 12.72,66.33 12.64,66.41 | FAN6.3 12.53,66.29 12.48,66.25 12.4,66.32 | 5.31,62.28 5.31,62.69 7,64.39
  Bottom 0.356: FAN6.3 12.53,65.18 11.74,64.39 7,64.39 6.81,64.39 5.3,62.88 5.3,51.24 8.04,48.51 18.44,48.51 22.88,44.06 24.93,44.06 24.98,44.06 28.38,47.46 30.06,47.46 30.94,46.58 30.94,38.57 31.06,38.45 32.53,36.98 39.76,36.98 41.11,35.62 IC1.4
FAN_VCC_1
  Top 0.254: 19.33,41.36 19.33,41.37 | 19.33,41.37 19.33,41.4 19.44,41.51 19.52,41.51 | 19.52,41.51 22.39,41.51 22.47,41.59 22.47,41.47 22.28,41.28 19.43,41.28 19.34,41.37 19.33,41.37 | C19.+ 19.4,41.39 19.52,41.51 | 41.07,43.03 41.07,43.16 40.97,43.25 | 40.97,43.25 40.04,44.19 | 41.11,43.25 40.97,43.25 | 41.12,41.77 41.18,41.77 41.26,41.85 41.26,43.18 40.82,43.62 40.6,43.62 | 40.6,43.62 40.08,44.13 39.94,44.13 | 40.6,43.62 41.01,43.2 41.01,41.87 41.11,41.77 41.19,41.77 41.25,41.83 | 39.94,44.13 39.84,44.23 | 40.36,43.94 40.27,43.94 40.08,44.13 39.84,44.13 | 39.84,44.13 37.71,44.13 37.42,44.42 | 39.94,44.13 39.84,44.13 | 37.12,44.73 37.77,44.08 39.88,44.08 40.93,43.03 40.93,41.94 41.1,41.76 41.12,41.77 | 41.11,41.77 41.12,41.77 | 41.12,41.77 41.16,41.82 | 41.16,41.82 41.17,41.83 | 41.05,41.96 41.05,41.81 41.11,41.75 41.16,41.75 | 41.16,41.75 41.22,41.75 41.38,41.91 41.38,43.05 40.8,43.63 | 41.16,41.82 41.16,41.75
  Top 0.356: C19.+ 22.3,41.38 28.52,47.59 34.32,47.59 37.68,44.23 39.84,44.23 40.13,44.23 41.11,43.25 IC1.25
  Bottom 0.254: 20.49,43.16 20.57,43.08 20.57,42.55 20.58,42.55 21.07,42.55 21.55,42.07 | 21.55,42.07 21.55,41.84 | 21.59,42.1 | 21.59,42.1 21.55,42.07 | 21.28,35.65 21.39,35.53 21.39,35.06 21.18,34.85 21.18,34.61 21.13,34.66 21.13,35.58 21.55,36 21.55,36.26 20.95,35.66 20.95,34.24 20.97,34.23 21,34.26 D7.C | 13.57,45.73 13.69,45.85 13.69,46.94 13.97,47.22 14.48,47.22 14.46,47.24 13.79,47.24 13.65,47.38 13.06,47.38 | 12.9,47.38 13.06,47.38 | 13.06,47.38 13.45,47 13.45,45.79 13.52,45.72 13.6,45.72 13.66,45.77 | R7.1 13.66,45.77 | 13.66,45.77 13.69,45.8 | 9.91,47.07 9.89,47.05 9.41,47.05 9.61,47.25 10.26,47.25 9.87,46.86 9.02,46.86 9.52,47.36 10.66,47.36 10.01,46.71 8.63,46.71 8.65,46.73 8.65,46.75 8.64,46.75 R14.2 8.76,46.77 8.8,46.81 8.63,46.81 8.57,46.75 8.57,47.08 8.97,47.47 9.78,47.47 | 17.74,43.98 17.97,43.75 20.13,43.75 21.63,42.24 | 21.63,42.24 21.63,40.94 | 21.59,42.1 21.59,42.2 21.63,42.24
  Bottom 0.356: 13.51,47.41 14.35,47.41 18.13,43.63 20.06,43.63 20.78,42.91 | R7.1 13.56,47.36 13.51,47.41 | R14.2 9.27,47.41 13.51,47.41 | 20.78,42.91 21.59,42.1 21.59,34.87 D7.C | 20.78,42.76 20.78,42.91
  Bottom 0.381: C19.+ 20.78,42.76
FAN_VCC_2
  Top 0.254: 33.51,44.23 33.7,44.23 | 29.2,45.85 29.34,45.85 29.34,45.84 29.36,45.84 30.85,44.34 33.13,44.34 33.46,44.66 33.55,44.66 33.99,44.23 33.93,44.23 33.65,44.51 33.65,45.72 | 33.65,45.72 33.65,45.79 33.59,45.85 33.46,45.85 33.39,45.78 33.39,44.58 33.08,44.28 33.11,44.28 33.55,44.71 33.57,44.71 34.05,44.23 | R8.1 33.51,45.73 33.52,45.72 33.65,45.72 | 37.36,43.08 37.63,43.08 38.63,42.07 38.63,41.95 38.61,41.93 38.61,41.86 38.59,41.86 IC1.26 | 37.36,43.08 37.22,43.21 | 38.47,42.05 38.47,41.91 38.54,41.84 38.6,41.84 38.7,41.94 38.7,42.25 37.83,43.12 37.35,43.12 | 37.35,43.12 37.33,43.13 | 37.36,43.08 37.36,43.11 37.35,43.12
  Top 0.356: R19.2 30.79,44.23 33.7,44.23 36.19,44.23 38.54,41.88 IC1.26 | R8.1 33.51,44.23
  Bottom 0.254: 25.82,42.34 25.86,42.3 26.31,42.3 27.3,41.31 27.41,41.31 27.48,41.38 | 27.48,41.38 27.48,41.54 26.47,42.55 26.47,42.91 | C20.+ 27.42,41.38 27.44,41.39 27.47,41.39 27.48,41.38
  Bottom 0.356: R19.2 26.19,42.72 | 26.19,42.72 24.3,40.84 D8.C | C20.+ 26.19,42.59 26.19,42.72
FAN_VCC_OUT_1
  Bottom 0.254: 3.6,46.74 3.6,47.05 2.64,48.01 2.54,47.91 2.54,47.61 3.47,46.68 | 3.47,46.68 3.57,46.68 3.61,46.73 3.61,47.05 3.57,47.09 3.56,47.08 R14.1 | 64.09,63.3 63.84,63.3 63.19,62.65 62.17,62.65 61.53,63.29 61.12,63.29 | 61.12,63.29 60.48,63.29 59.52,64.25 60.05,64.25 60.71,64.91 61.39,64.91 62.06,64.24 | 60.76,63.7 61.05,63.7 61.12,63.64 61.12,63.29 | 48.42,64.05 48.42,64.13 49.15,64.86 49.99,64.86 50.28,64.56 | 50.28,64.56 50.61,64.24 | 49.66,63.7 49.66,63.94 49.72,64 | 50.28,64.56 50.25,64.56 50.06,64.37 49.57,64.37 | 47.23,63.44 46.97,63.44 46.29,62.75 46.29,59.27 44.91,57.88 44.6,57.88 | 44.6,57.88 43.89,57.18 43.8,57.26 43.8,58.45 45.06,59.71 45.06,62.73 44.58,63.21 | 44.6,57.88 44.49,57.88 44.4,57.8 | 40.76,63.72 40.16,63.12 38.48,63.12 37.48,64.13 37.48,66.58 37.75,66.85 37.75,64.38 37.1,63.74 37.3,63.74 37.49,63.92 37.99,63.92 38.26,64.2 38.42,64.04 38.54,64.04 38.49,64.09 38.45,64.09 | 33.41,63.73 32.53,63.73 31.09,65.16 31.02,65.16 31,65.19 31,65.01 32.35,63.65 | 32.35,63.65 33.31,63.65 | 32.43,63.7 32.41,63.7 32.35,63.65 | 28.81,71.16 31,68.97 31,68.71 31.05,68.76 31.05,69.08 | 3.62,46.69 3.67,46.74 3.67,47.17 2.62,48.22 2.62,48.43 | 2.62,48.64 2.62,48.43 | 2.62,48.43 3.68,47.36 3.68,46.75 3.6,46.67 3.47,46.67 3.45,46.69 3.45,46.71 | 3.45,46.71 3.37,46.79 | 3.47,46.68 3.47,46.7 3.46,46.71 3.45,46.71
  Bottom 0.356: 38.07,63.7 32.43,63.7 31.05,65.08 31.05,69.08 28.95,71.17 8.57,71.17 2.6,65.21 2.6,47.73 R14.1
  Bottom 0.381: 38.07,63.7 38.45,64.09
  Bottom 1.422: 62.64,63.7 71.8,63.7 72.57,64.47 FAN1.2 | 62.64,63.7 60.76,63.7 | 60.76,63.7 49.66,63.7 | 49.66,63.7 45.71,63.7 | 45.71,63.7 38.85,63.7 38.45,64.09 38.07,64.47 FAN4.2 | FAN2.2 61.07,64.01 60.76,63.7 | FAN3.2 49.57,64.37 49.57,63.79 49.66,63.7 | D6.C 62.7,63.64 62.64,63.7 | 45.71,63.7 45.6,63.59 45.65,63.54 45.65,59.45 44.4,58.2 44.4,57.8 Q2.D
FAN_VCC_OUT_2
  Bottom 0.254: 24.2,45.77 24.2,46 24,46.2 22.34,46.2 22.29,46.26 | 22.05,46.5 22.29,46.26 | 22.29,46.26 23.93,46.26 24.23,45.96 24.23,45.8 24.02,46.02 22.75,46.02 23.04,45.73 24.23,45.73 24.19,45.77 R19.1 24.21,45.82 24.21,45.98 24.24,45.94 24.24,45.71 24.13,45.6 22.84,45.6 22.67,45.78 22.67,46.08 | 29.32,60.47 29.31,60.46 29.31,60.39 29.61,60.39 29.89,60.68 29.89,62.99 28.61,64.28 27.53,64.28 27.1,64.71 26,64.71 25.63,64.34 26.85,64.34 27.03,64.15 | 27.03,64.15 28.72,62.47 28.72,60.71 29.06,60.36 29.53,60.36 29.63,60.47 | 26.88,63.86 26.88,64 27.03,64.15 | 15.06,66.93 14.79,66.93 14.48,66.62 14.48,64.59 14.2,64.31 13.42,64.31 11.83,62.72 11.83,63.08 11.86,63.11 11.81,63.11 11.75,63.16 11.42,63.16 | 14.84,64.11 12.86,62.13 12.86,58.24 11.68,57.06 11.68,54.24 11.27,53.83 10.94,53.83 10.52,54.25 10.52,57.59 11.68,58.75 11.68,62.89 11.42,63.16 | 14.84,64.11 15.01,64.28 15.01,64.62 | 15.09,63.7 15.09,63.85 14.84,64.11 | 12.01,62.44 12.01,62.47 11.39,63.09 | 11.39,63.09 11.31,63.17 | 11.42,63.16 11.44,63.14 11.39,63.09 | 6.21,61.68 6.21,61.91 7.44,63.14 7.39,63.14 7.38,63.13 7.38,63.17
  Bottom 0.356: 13.04,63.17 7.38,63.17 7.28,63.17 6.2,62.09 6.2,52.22 8.79,49.63 18.89,49.63 22.75,45.77 R19.1 | 28.33,63.7 27.52,63.7 27.48,63.66 27.08,63.66 26.88,63.86 26.57,63.86 | 13.72,63.7 13.36,63.35 13.21,63.35
  Bottom 0.381: 13.04,63.17 13.21,63.35
  Bottom 1.422: 15.09,63.7 28.33,63.7 29.3,62.73 D5.C | FAN5.2 26.57,63.86 | 15.09,63.7 13.72,63.7 12.26,62.25 12.26,58.5 11.1,57.34 Q1.D | FAN6.2 15.09,66.31 15.09,63.7
GND
  Top 0.254: 10.59,25.82 10.59,25.52 11.25,24.86 12.38,24.86 12.57,25.05 12.57,25.55 12.49,25.62 11.2,25.62 11.14,25.68 11.14,25.82 11.25,25.93 12.24,25.93 12.67,25.5 12.4,25.5 12.13,25.77 11.51,25.77 11.5,25.76 11.5,25.14 11.44,25.08 12.23,25.08 12.27,25.11 12.27,25.7 11.62,26.36 11.62,26.17 11.68,26.11 | 31.67,34.26 31.67,34.4 31.62,34.45 30.76,34.45 30.62,34.59 30.62,34.49 30.72,34.38 30.72,35.5 30.79,35.57 30.91,35.57 30.93,35.55 30.93,34.54 30.78,34.39 30.78,34.52 30.8,34.54 31.57,34.54 31.64,34.61 31.64,34.69 31.12,35.21 31.12,34.78 31.13,34.77 31.37,34.77 31.42,34.72 | 31.68,33.67 31.46,33.67 31.1,34.03 31.29,34.03 31.41,34.15 31.41,34.11 31.65,33.87 31.64,33.87 31.58,33.81 31.58,33.82 31.5,33.9 31.5,33.95 31.67,34.12 31.67,34.02 31.44,33.79 | 31.44,33.79 31.44,33.39 | 31.44,33.79 31.44,33.83 31.29,33.83 30.93,34.2 30.52,34.2 30.45,34.27 30.45,35.42 30.56,35.53 | 21.4,29.8 21.23,29.62 21.23,28.41 21.43,28.61 21.43,29.8 21.64,29.59 21.64,28.6 | 12.38,25.07 12.38,25.29 12.63,25.54 12.65,25.52 12.65,25.12 12.4,24.87 11.3,24.87 10.63,25.54 10.63,25.8 10.66,25.83 11.32,25.83 11.61,26.12 11.61,26.36 11.71,26.26 11.71,25.27 11.85,25.42 12.1,25.42 11.96,25.29 11.96,25.27 11.98,25.25 12.12,25.25 12.06,25.18 11.29,25.18 11.32,25.16 11.32,25.12 11.3,25.14 11.3,25.62 11.29,25.63 10.86,25.63 11.16,25.33 11.16,25.2 11.19,25.24 11.19,25.41
  pour Top (isolate 0.61): 91.64,1.68 8.39,1.66 8.39,4.54 arc90 4.52,8.34 1.66,8.34 1.67,71.64 4.74,71.64 arc90 8.38,75.29 8.38,78.34 91.57,78.34 91.63,75.43 arc90 95.38,71.64 98.33,71.65 98.34,8.36 95.39,8.37 arc90 91.64,4.63
I2C_SCL
  Top 0.254: 33.51,41.94 33.48,41.94 | 33.48,41.94 33.37,41.83 33.37,39.89 33.38,39.87 33.46,39.87 33.59,40 33.59,41.84 33.5,41.94 33.42,41.94 33.37,41.88 | 33.58,41.85 33.49,41.95 33.48,41.95 33.41,41.88 33.36,41.88 33.37,41.88 | IC1.28 33.37,41.88 | 14.42,28.97 14.42,28.8 13.8,28.18 13.13,28.18 12.98,28.02 13.88,28.02 13.89,28.03 13.95,28.03 14.45,28.54 14.45,28.38 14.34,28.27 12.96,28.27 12.58,27.89 12.58,27.84 12.59,27.82 I/O_5.SCL | 14.43,30.15 14.4,30.17 14.4,30.55 | 14.4,30.55 15.4,31.55 | 15.4,31.55 16.37,31.55 | 14.4,30.55 14.43,30.55 14.49,30.48 | 14.4,30.36 14.4,30.61 15.36,31.56 | 15.36,31.56 16.42,31.56 | 15.4,31.55 15.37,31.55 15.36,31.56 | 23.26,30.18 23.26,30.4 22.13,31.53 21.24,31.53 | 21.24,31.53 21.21,31.5 | 21.24,31.53 21.28,31.56 22.37,31.56 23.3,30.63 23.3,30.58 | 23.3,30.58 23.3,29.81 | 23.25,30.53 23.25,30.57 23.27,30.58 23.3,30.58 | 28.82,33.47 28.63,33.67 28.63,35.04 | 28.63,35.04 28.58,35.09 28.55,35.09 28.4,34.95 28.4,33.81 28.77,33.45 28.79,33.45 | 28.48,34.96 28.54,34.96 28.63,35.04 | 33.47,41.95 33.44,41.93 33.39,41.93 | 33.39,41.93 33.34,41.88 33.34,39.92 | 33.48,41.94 33.4,41.94 33.39,41.93 | 29.83,26.83 30.03,26.83 31.73,28.53 31.73,28.64 | 31.73,28.64 31.73,30.54 | 31.84,28.52 31.84,28.53 31.73,28.64 | 25.43,26.85 25.37,26.79 24.5,26.79 23.19,28.1 23.19,30.59 | 23.19,30.59 23,30.79 | 23.19,30.59 23.18,30.59 23.18,30.6 23.18,30.61 | 77.1,22.83 77.15,22.83 | 77.15,22.83 77.24,22.83 79.17,20.9 79.17,17.98 78.22,17.02 76.65,17.02 | R11.2 77.14,22.75 77.15,22.73 77.15,22.83
  Top 0.356: R11.2 79.08,20.84 79.08,18.16 78,17.07 69.12,17.07 IC2.28 | IC1.28 33.49,39.97 28.48,34.96 28.48,33.79 31.84,30.43 31.84,28.52 30.16,26.84 24.62,26.84 23.25,28.21 23.25,30.53 23.18,30.61 22.28,31.51 15.52,31.51 14.49,30.48 14.45,30.43 14.45,28.32 13.95,27.82 I/O_5.SCL
  Bottom 0.254: 73.95,27.37 73.98,27.37 74.36,27 | 74.36,27 74.36,25.53 74.43,25.45 | 74.36,27 74.29,27 74.2,27.09 | 44.59,45.68 44.75,45.84 44.75,46.96 43.99,47.73 43.6,47.73 | 43.07,47.73 43.6,47.73 | 43.6,47.73 44.39,46.93 44.39,45.81 44.55,45.66 44.59,45.66 44.58,45.68 I/O_4.SCL | 33.78,43.6 33.67,43.48 33.67,42.55 | 33.67,42.55 33.67,39.93 33.57,39.93 33.32,40.17 33.32,43.26 33.48,43.41 | 33.49,43.34 33.49,42.73 33.67,42.55 | 33.59,40.35 33.68,40.25 | 33.68,40.25 34.95,38.99 35.17,38.99 | 33.49,40.09 33.51,40.09 33.68,40.25
  Bottom 0.356: I/O_4.SCL 44.58,46.92 43.82,47.69 37.83,47.69 33.49,43.34 IC1.28 33.49,40.09 34.59,38.98 49.3,38.98 52.48,35.81 67.49,35.81 71.29,32.01 71.29,30 74.2,27.09 74.2,25.71 R11.2
I2C_SDA
  Top 0.254: 36,41.85 36.05,41.85 36.07,41.83 36.08,41.83 36.21,41.96 36.21,42.8 35.95,43.06 35.6,43.06 35.43,43.23 35.43,43.22 35.9,42.74 35.74,42.74 35.07,43.42 35.07,43.41 35.84,42.64 35.84,41.98 35.99,41.83 IC1.27 36.05,41.89 IC1.27 | 24.36,30.68 24.41,30.73 24.41,31.23 | 24.41,31.23 23.08,32.56 21.82,32.56 | 27.56,33.28 27.39,33.45 27.39,34.94 | 27.39,34.94 27.39,35.62 27.65,35.88 | 27.29,35.51 27.29,35.04 27.39,34.94 | 29.28,27.97 29.5,27.97 | 29.5,27.97 30.48,28.95 30.48,30.34 30.37,30.45 | 29.5,27.97 29.62,27.97 | 25.75,27.97 25.37,27.97 24.43,28.91 24.43,31.24 | 24.43,31.24 23.11,32.56 | 24.41,31.23 24.43,31.23 24.43,31.24 | 15.34,32.57 14.54,32.57 12.54,30.57 12.54,30.43 12.58,30.39 12.58,30.36 12.59,30.36 I/O_5.SDA | 80.22,23.32 77.09,26.45 77.09,26.59 77.12,26.56 77.14,26.56 R10.2 | 65.26,12.85 65.23,12.82 64.23,12.82 63.76,13.29 63.76,14.45 63.78,14.46 | 63.78,14.46 63.84,14.52 64.11,14.52 64.17,14.47 64.17,13.46 64.74,12.89 | IC2.27 63.78,14.46
  Top 0.356: R10.2 80.26,23.45 80.26,15.41 77.73,12.88 64.51,12.88 63.97,13.42 IC2.27 | I/O_5.SDA 14.77,32.52 22.95,32.52 24.36,31.11 24.36,30.68 24.36,28.77 25.17,27.97 29.62,27.97 30.64,28.98 30.64,30.2 27.29,33.54 27.29,35.51 30.71,38.93 30.71,42.05 32.09,43.42 35.52,43.42 36.03,42.91 IC1.27
  Bottom 0.254: 77.17,26.59 76.12,27.64 75.45,27.64 76.34,26.75 76.84,26.75 76.12,27.47 75.77,27.47 76.37,26.87 76.44,26.87 76.71,26.59 77.2,26.59 | 77.2,26.59 76.14,27.65 75.37,27.65 | R10.2 77.18,26.57 77.2,26.59 | 47.16,45.83 47.32,45.67 47.32,44.37 46.72,43.76 45.3,43.76 45.39,43.86 46.33,43.86 46.97,44.5 46.97,45.73 47.02,45.77 | 47.02,45.77 47.08,45.84 47.14,45.84 | I/O_4.SDA 47.12,45.74 47.08,45.7 47.02,45.77 | 37.26,43.82 37.22,43.86 36.47,43.86 35.8,43.18 35.8,40.4 36.34,39.86 36.81,39.86 36.74,39.93 | 36.74,39.93 36.2,40.47 36.2,43.07 36.93,43.81 37.05,43.81 | 36.49,39.93 36.74,39.93
  Bottom 0.356: I/O_4.SDA 47.12,44.42 46.52,43.82 36.72,43.82 36.03,43.13 IC1.27 36.03,40.39 36.49,39.93 50.45,39.93 53.81,36.57 68.76,36.57 72.54,32.8 72.54,30.43 76.39,26.57 R10.2
N$1
  Bottom 0.254: 5.32,9.72 4.62,10.42 4.62,11.74 4.43,11.93 4.25,11.75 4.25,10.26 4.91,9.61 5.65,9.61 5.74,9.7 5.25,9.7 4.62,10.33 4.62,11.74 4.46,11.9 4.43,11.87 I/O_3.RST | 29.32,15.32 29.82,15.32 31.41,16.91 31.55,16.91 | 31.51,16.88 31.55,16.91 | 31.55,16.91 31.8,16.91 | 70.16,14.34 70.06,14.34 69.74,14.65 69.74,15.49 68.44,16.79 68.44,16.82 68.54,16.92 68.6,16.92 68.64,16.88 | 68.64,16.88 69.98,15.54 69.98,14.51 69.97,14.49 69.97,15.44 69.69,15.72 69.69,15.84 68.59,16.94 67.96,16.94 | 68.51,16.88 68.57,16.81 68.58,16.81 68.64,16.88
  Bottom 0.356: C14.1 69.89,14.59 69.89,15.49 68.51,16.88 31.51,16.88 29.93,15.3 24.19,15.3 18.55,9.66 5.07,9.66 4.43,10.3 I/O_3.RST
N$4
  Bottom 0.254: 80.93,31.23 81.39,31.7 81.45,31.7 81.04,32.12 81.04,33.14 80.99,33.19 80.8,33.19 80.83,33.15 | 80.83,33.15 80.83,29.99 80.9,29.92 80.91,29.92 | D2.C 80.9,33.11 80.91,33.1 80.89,33.1 80.83,33.15 | 93,30.28 93.04,30.32 93.04,30.54 91.81,31.78 91.3,31.78 | 93,30.43 93,30.28 | 93,30.28
  Bottom 0.356: M1.G 93,30.43 91.7,31.73 80.93,31.73 80.91,31.71 | R27.1 80.91,31.71 | 80.91,31.71 D2.C
N$7
  Bottom 0.254: 48.98,13.19 48.93,13.19 48.52,13.59 48.52,14.43 | 48.52,14.43 48.62,14.53 48.8,14.53 48.83,14.49 48.83,13.61 49.23,13.21 49.23,13 49.2,12.97 | IC2.21 48.7,14.43 48.52,14.43
  Bottom 0.356: IC2.21 48.73,13.45 C13.1
N$8
  Bottom 0.254: 90.44,56.82 90.02,56.4 90.02,55.8 90.38,55.44 | 90.38,55.44 93.24,52.58 94.98,52.58 | 90.5,57.1 93.69,53.92 96.46,53.92 95.12,52.58 94.98,52.58 | 90.59,56.11 90.69,56.11 90.7,56.09 90.7,55.76 90.38,55.44 | 93.23,53.02 93.67,52.58 94.98,52.58 | 94.98,52.58 95.26,52.58 98.4,55.72 98.4,68.63 96.41,70.62 84.61,70.62 82.6,68.6 82.6,65.57 | 82.6,65.57 82.96,65.21 83.45,65.21 83.82,65.57 83.82,68.4 83.92,68.49 | 94.98,52.58 | 90.81,59.82 90.81,59.89 91.5,60.58 91.5,60.85 91.13,61.22 91.13,61.21 91.51,60.83 92.86,60.83 92.96,60.72 92.96,60.66 92.9,60.6 | 92.9,60.6 91.06,60.6 91.02,60.56 | PWR.A 92.9,60.6 | 88.88,66.11 89.12,66.34 89.53,66.34 | 89.53,66.34 89.97,65.9 92.87,65.9 92.97,65.8 92.97,65.72 92.91,65.66 | 92.91,65.66 90.69,65.66 90.34,65.31 90.34,65.57 90.52,65.75 90.52,64.92 90.5,64.89 90.5,65.69 90.48,65.71 90.48,65.34 | 90.48,65.34 91.17,64.65 91.17,56.3 90.99,56.12 | FUSE.A 92.9,65.66 92.91,65.66 | 89.84,64.75 89.43,64.75 88.98,65.2 87.18,65.2 86.84,65.53 86.84,66.14 87.06,66.35 89.57,66.35 89.72,66.2 | 89.72,66.2 90.1,65.83 | 89.53,66.34 89.53,66.01 | 89.53,66.01 89.48,65.96 | 89.53,66.01 89.72,66.2 | 90.79,63.33 91.16,63.71 91.16,65.38 91.46,65.67 91.19,65.67 91.03,65.51 90.81,65.51 90.76,65.45 90.81,65.45 91.07,65.2 91.07,65.12 91.03,65.08 90.93,65.08 90.67,65.34 90.48,65.34 | 93.78,53.32 94.03,53.32 94.76,52.59 95.47,52.59 98.42,55.54 98.42,68.71 96.47,70.66 84.47,70.66 82.59,68.78 82.59,65.58 82.99,65.18 83.3,65.18 | 83.3,65.18 83.45,65.18 | 82.6,65.57 83.17,65.57 83.3,65.7 83.3,65.18
  Bottom 0.381: FUSE.A 89.57,65.76 89.41,65.6 | PWR.A 90.99,60.7 90.59,61.1
  Bottom 1.27: 89.23,65.78 89.41,65.6
  Bottom 1.406: POWER.2 83.2,68.33 84.91,70.04 96.14,70.04 97.83,68.35 97.83,56.11 F1.1 93.42,53.27 90.59,56.11 90.59,61.1 90.59,64.42 89.41,65.6 | POWER.1 89.23,65.78
N$9
  Top 0.254: 95.42,60.71 95.42,60.86 95.49,60.92 96.85,60.92 97.58,60.19 97.58,59.67 | 97.58,59.17 97.58,59.67 | 97.58,59.67 96.69,60.56 95.72,60.56 | 95.72,60.56 95.46,60.56 95.39,60.63 95.39,60.86 95.45,60.91 | PWR.K 95.58,60.7 95.72,60.56 | 95.49,29.97 95.49,30.2 95.62,30.33 96.59,30.33 97.44,31.18 97.44,30.58 96.62,29.76 | 96.62,29.76 96.14,29.76 | 96.14,29.76 97.22,30.85 97.29,30.85 96.63,30.19 95.76,30.19 95.48,29.91 95.48,29.84 95.55,29.76 95.72,29.76 | 96.14,29.76 95.72,29.76 | 96.62,29.76 96.81,29.76 97.6,30.55 97.6,32.53 97.44,32.37 97.44,31.12 | R13.2 95.54,29.94 95.72,29.76
  Top 0.356: R13.2 96.73,29.98 97.51,30.75 97.51,33.59
  Top 0.381: 97.51,31.98 97.51,33.59 97.51,59.97 96.78,60.7 PWR.K
N$10
  Bottom 0.254: 20.81,14.9 21.08,15.17 21.08,16.82 | 21.08,16.82 21.61,17.35 | 21.08,16.82 21.11,16.8 21.18,16.8 | 30.62,18.68 29.67,18.68 28.52,19.83 | 28.52,19.83 28.41,19.94 27.9,19.94 | 28.31,19.88 28.36,19.83 28.52,19.83 | 61.44,22.13 61.49,22.13 61.61,22.01 61.61,20.52 61.49,20.4 61.39,20.4 61.27,20.28 61.27,22.03 | 61.27,22.03 61.39,22.15 | IC2.3 61.37,22.03 61.27,22.03
  Bottom 0.356: IC2.3 61.43,20.41 59.7,18.68 29.52,18.68 28.31,19.88 24.2,19.88 21.18,16.86 21.18,16.8 21.18,15.2 19.71,13.73 17.8,13.73 14.61,10.54 12.73,10.54 8.9,14.38 I/O_3.RX
N$11
  Top 0.254: 31.52,57.79 31.73,58.01 31.73,58.2 30.93,57.4 30.76,57.4 31.28,56.88 32.63,56.88 32.84,57.08 32.84,62.31 30.86,64.3 26.32,64.3 24.86,62.84 24.86,60.67 25.14,60.38 25.44,60.38 25.55,60.5 25.55,61.03 25.52,61 25.42,61 R1.2
  Top 1.422: R1.2 25.44,62.58 26.56,63.7 30.6,63.7 32.25,62.05 32.25,57.12 32.21,57.09 | IC3.7 32.21,57.09 | 32.21,57.09 IC3.6
N$12
  Bottom 0.254: 51.02,56.26 51.02,59.07 52.5,60.55 54.15,60.55 52.18,58.58 52.18,55.8 50.21,53.84 47.13,53.84 46.69,54.28 46.83,54.42 Q2.G
  Bottom 1.27: Q2.G 46.94,56.75 49.3,59.11 D10.A
  Bottom 1.422: Q2.G 49.93,54.42 51.6,56.1 51.6,58.82 R2.1
N$13
  Top 0.254: 64.94,58.13 64.4,57.59 64.21,57.59 64.92,56.88 65.82,56.88 66.07,57.12 66.07,62.83 64.62,64.28 59.69,64.28 58.27,62.85 58.27,60.71 58.59,60.38 58.85,60.38 58.96,60.5 58.96,60.74 58.89,60.82 58.89,60.86 58.84,60.91 R2.2
  Top 1.422: R2.2 58.84,62.58 59.97,63.7 64.38,63.7 65.5,62.58 65.5,57.1 65.48,57.09 | IC4.7 65.48,57.09 | 65.48,57.09 IC4.6
N$14
  Top 0.254: 95.43,65.76 95.43,65.83 95.52,65.92 97.39,65.92 98.38,64.93 98.38,63.57 98.24,63.72 98.24,64.68 97.29,65.62 95.72,65.62 | 95.72,65.62 95.52,65.62 95.42,65.72 95.42,65.79 97.07,65.79 98.24,64.62 | FUSE.K 95.59,65.76 95.72,65.62 | 95.5,26.58 95.48,26.59 95.47,26.59 95.67,26.8 97.16,26.8 98.29,27.93 98.29,28.16 98.39,28.06 98.39,27.58 97.28,26.47 95.52,26.47 95.45,26.53 95.45,26.73 95.5,26.78 95.72,26.78 | 95.72,26.78 96.16,26.78 96.24,26.69 | M1.S 95.54,26.6 95.72,26.78
  Top 0.356: 98.31,64.16 98.31,64.75 97.31,65.76 FUSE.K
  Top 0.381: 98.31,64.16 98.31,27.67 97.22,26.57 M1.S
N$16
  Bottom 0.254: 4.47,16.83 4.46,16.82 4.33,16.82 4.2,16.94 4.2,18.34 4.57,18.71 4.95,18.71 5.03,18.63 5.03,18.58 4.65,18.19 4.65,16.99 4.49,16.84 4.43,16.84 I/O_3.TX | 10.02,17.02 10.02,16.96 10.19,16.79 10.19,15.53 10.34,15.38 10.34,15.44 10.29,15.49